# Altium PCB Stlink-v4-dongle.PcbDoc
Units mm, origin at the board's own origin, x right, y up, seen from the top; angles counter-clockwise.
Board outline 30.99 x 14.48 mm, 2 copper layers (Top Layer, Bottom Layer); 32 components, 27 nets, 126 pads, 31 vias.
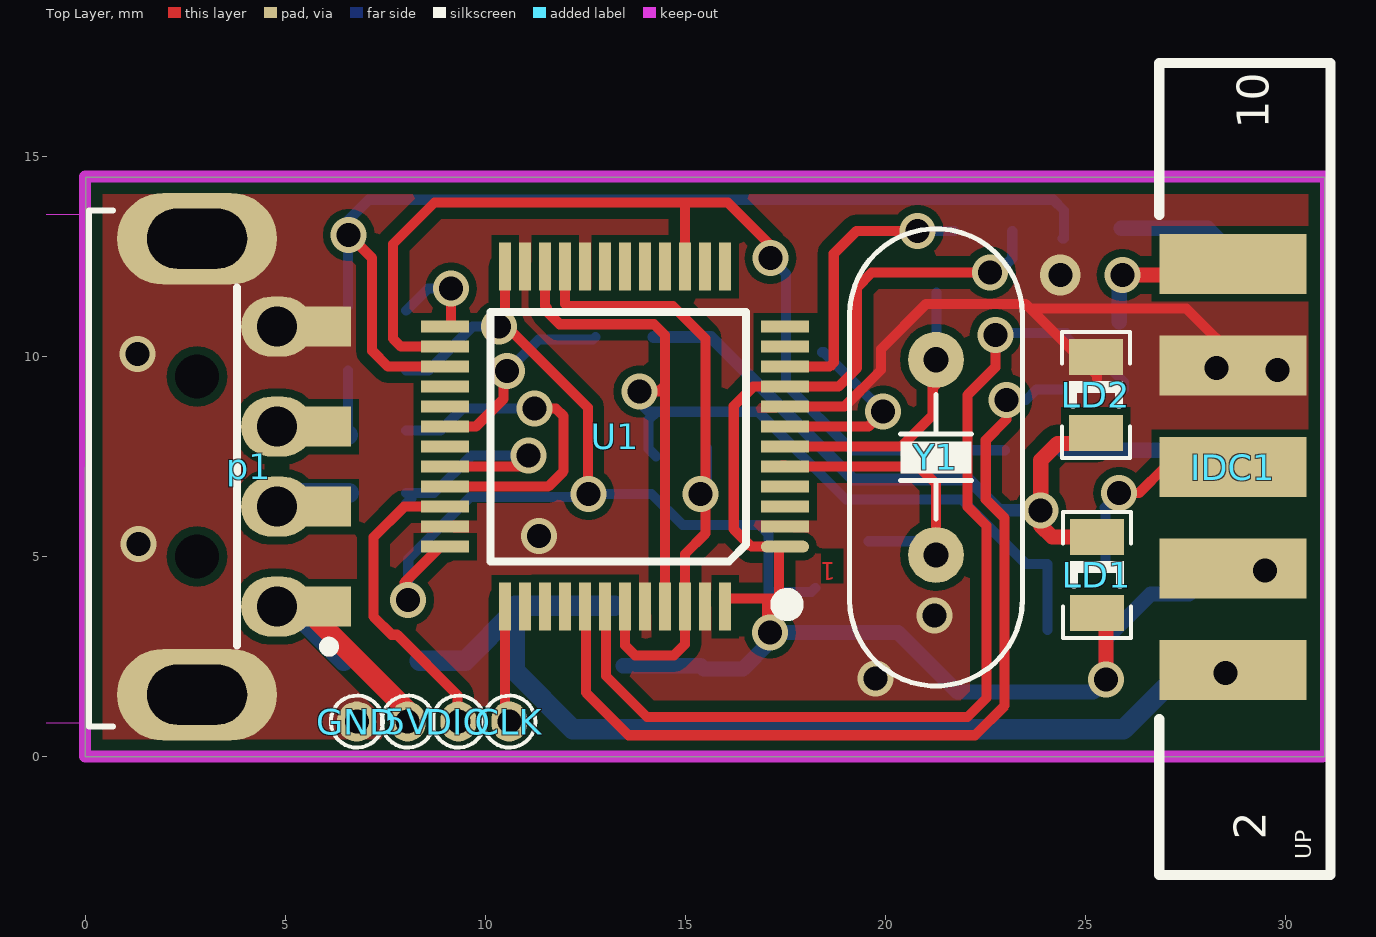
[diagram p0: Top Layer view]
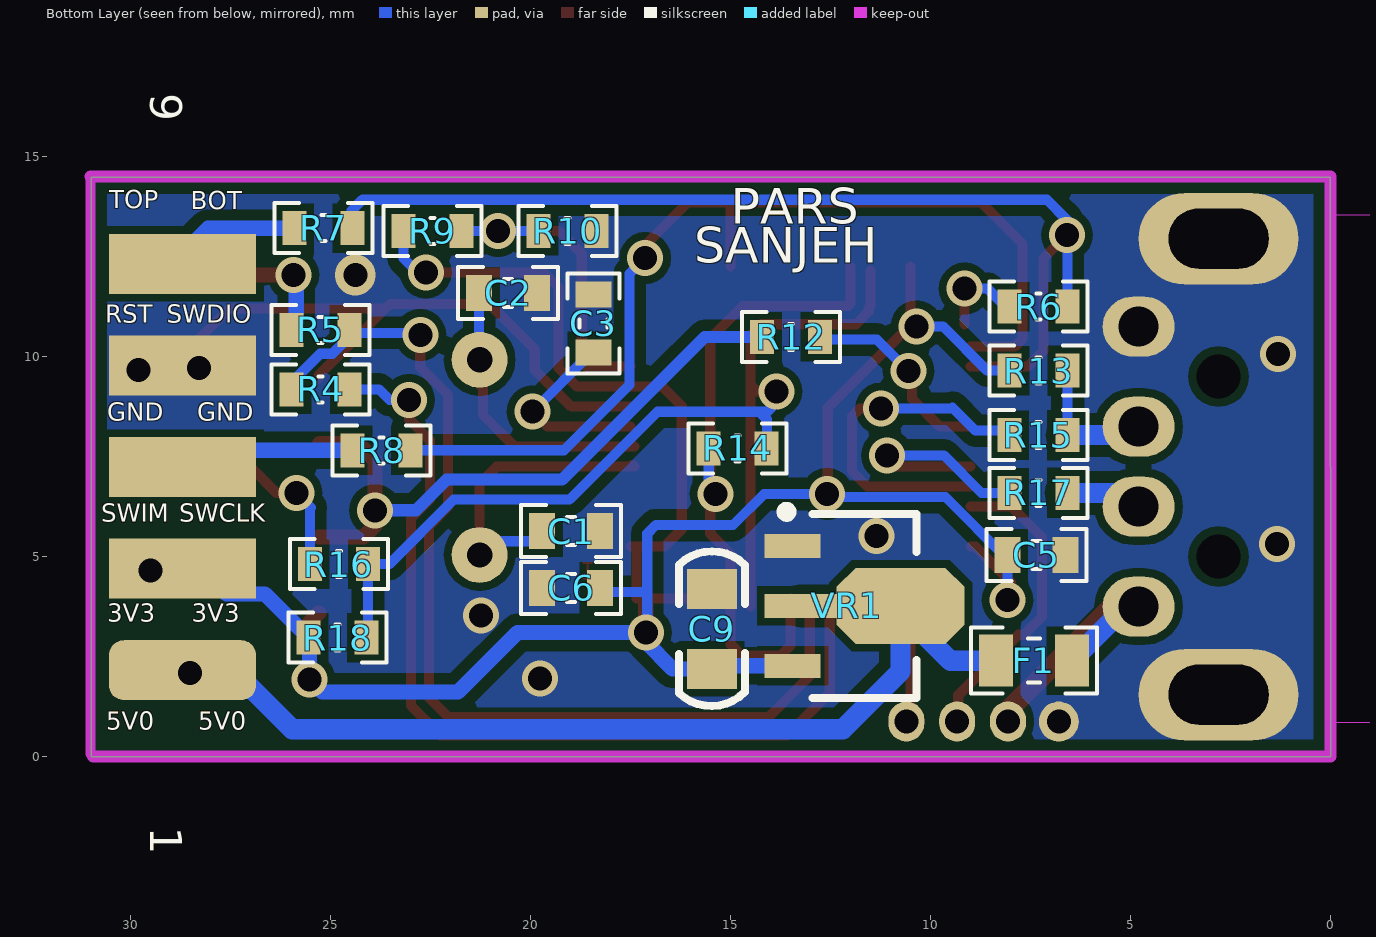
[diagram p1: Bottom Layer view, seen from below]
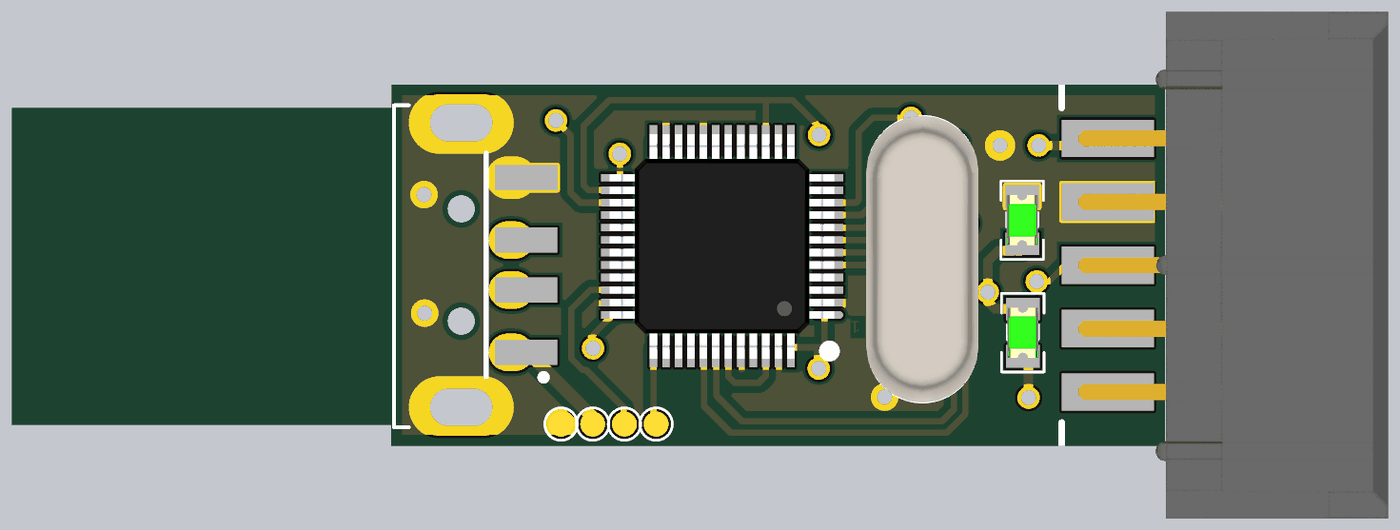
[diagram p2: 3D render of the assembled board from above, using the file's embedded part models]
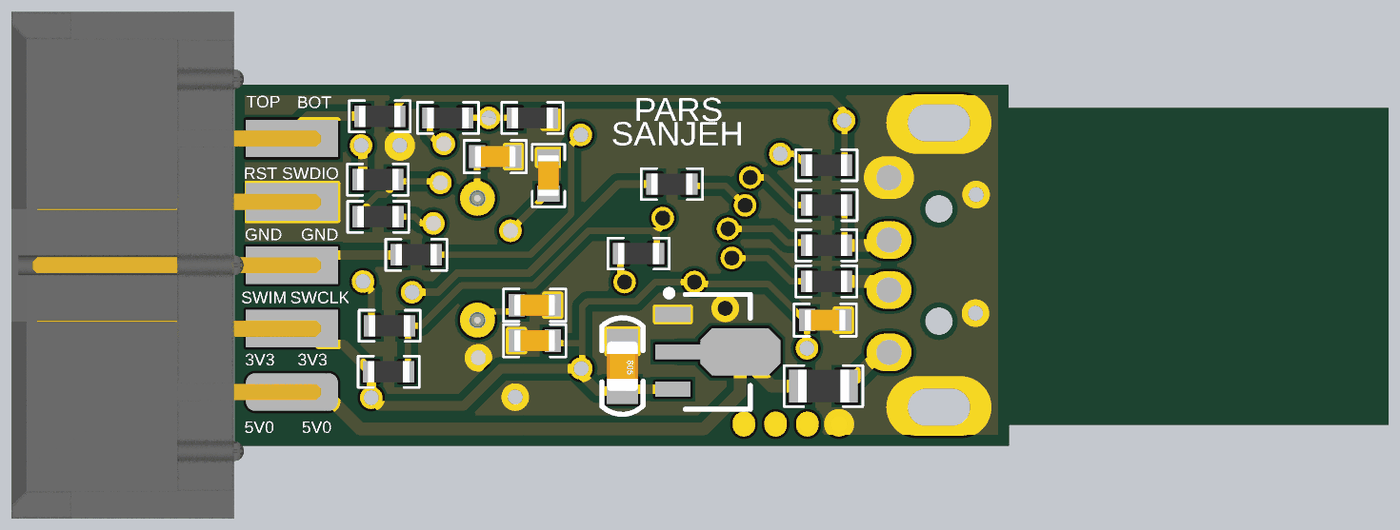
[diagram p3: 3D render of the assembled board from below, using the file's embedded part models]

## Layer stack, top to bottom
Top Solder: solder mask 0.0102, Solder Resist, Dk 3.5
Top Layer: signal copper 0.0356
Dielectric 1: dielectric 0.32, FR-4, Dk 4.8
Bottom Layer: signal copper 0.0356
Bottom Solder: solder mask 0.0102, Solder Resist, Dk 3.5

## Board outline
0.015,14.478 30.988,14.478 30.988,0 0,0

## Design rules (kind name [scope] priority, off if disabled: settings)
Clearance [All] p1: gap=0.2 ignorepadtopadclearanceinfootprint=FALSE except(0: Arc-Hole Track-Hole SMDPad-Hole THPad-Hole Via-Hole Fill-Hole Poly-Hole Region-Hole Text-Hole; 0.279: Arc-Fill Arc-Poly Arc-Region Track-Fill Track-Poly Track-Region)
DiffPairsRouting [All] p1: maxlimit=0.254 minlimit=0.178 mostfreqgap=0.254 toplayer_minwidth=0.254 toplayer_maxwidth=0.381 toplayer_prefwidth=0.254 bottomlayer_minwidth=0.254 bottomlayer_maxwidth=0.381 bottomlayer_prefwidth=0.254 maxuncoupledlength=12.7
PlaneConnect [All] p1: planeconnectstyle=Direct reliefexpansion=0.508 reliefentries=4 reliefconductorwidth=0.254 reliefairgap=0.254
PolygonConnect [All] p1: connectstyle=Direct reliefconductorwidth=0.254 reliefentries=4 polygonreliefangle="90 Angle" airgapwidth=0.254
RoutingVias [All] p1: holewidth=0.508 width=0.9 viastyle="Through Hole" minholewidth=0.508 minwidth=0.9 maxholewidth=0.508 maxwidth=0.9
SolderMaskExpansion [All] p1: expansion=0.102
Width [All] p1: maxlimit=5 minlimit=0.254 preferedwidth=0.254 minimp=50.000000 maximp=50.000000 favimp=50.000000
28 further rules are at their usual default settings.

## Classes and differential pairs
differential pair USBD: +USBD_P -USBD_N

## Components (designator, comment, footprint, x,y, rotation, side; value= is the part's Value field where it differs from the comment)
5V "Test Point" "TEST POINT SMALL"#1 8.067,0.875 r180 top
C1 "Capacitor SMD" CAP0603 18.985,5.639 r0 bottom value=22pF
C2 "Capacitor SMD" CAP0603 20.563,11.593 r0 bottom value=22pF
C3 "Capacitor SMD" CAP0603 18.43,10.831 r270 bottom value=0.1uF
C5 "Capacitor SMD" CAP0603 7.355,5.04 r0 bottom value=0.1uF
C6 "Capacitor SMD" CAP0603 18.985,4.216 r180 bottom value=0.1uF
C9 "Capacitor SMD" "0805 Capacitor" 15.469,3.191 r0 bottom value=10uF
CLK "Test Point" "TEST POINT SMALL"#1 10.607,0.875 r180 top
DIO "Test Point" "TEST POINT SMALL"#1 9.337,0.875 r180 top
F1 "100mA" RES0805 7.421,2.399 r0 bottom
GND "Test Point" "TEST POINT SMALL"#2 6.797,0.875 r180 top
IDC1 "CONNECTOR_IDC_5X2" "IDC2.54-10PIN - CROSS" 28.956,7.239 r90 top
LD1 "Grn" LED_0805 25.298,4.562 r90 top
LD2 "Red" LED_0805 25.273,9.068 r90 top
p1 "USB Connector" "USB A TYPE Right Angle" 0.1,7.248 r180 top
R4 "Resistor SMD" RES0603 25.249,9.18 r180 bottom value=220R
R5 "Resistor SMD" RES0603 25.259,10.668 r0 bottom value=100R
R6 "Resistor SMD" RES0603 7.3,11.248 r180 bottom value=100R
R7 "Resistor SMD" RES0603 25.183,13.208 r0 bottom value=100R
R8 "Resistor SMD" RES0603 23.724,7.656 r0 bottom value=100R
R9 "Resistor SMD" RES0603 22.455,13.143 r180 bottom
R10 "Resistor SMD" RES0603 19.076,13.143 r0 bottom
R12 "Resistor SMD" RES0603 13.487,10.49 r180 bottom value=1.8K
R13 "Resistor SMD" RES0603 7.3,9.648 r0 bottom value=1K5
R14 "Resistor SMD" RES0603 14.823,7.707 r0 bottom value=220R
R15 "Resistor SMD" RES0603 7.305,8.037 r0 bottom value=22R
R16 "Resistor SMD" RES0603 24.791,4.812 r0 bottom value=100R
R17 "Resistor SMD" RES0603 7.305,6.59 r0 bottom value=22R
R18 "Resistor SMD" RES0603 24.827,2.972 r0 bottom value=680R
U1 "STM32F103C8T6" LQFP48 13.25,7.998 r180 top
VR1 "HT7533-3" SOT89N 11.651,3.769 r180 bottom
Y1 "8MHz" "CRYSTAL Small" 21.275,7.48 r90 top

## Footprints (in the part's own frame and the unit in brackets; to place one, negate y for a bottom-side part, rotate by r counter-clockwise, add the part's x,y. Pads: shape width x height; smd on the part's side, far side on the other; paste and mask are expansions set on the pad)
"0805 Capacitor" [mm]
  rect 1.25x1 smd: 1(0,-1) 2(0,1)
  silkscreen extent -0.82,-1.94 0.83,1.93, body extent -0.62,-1 0.63,1, height 0.78
CAP0603 [mm] "Chip Capacitor, 2-Leads, Body 1/60x0/80mm, IPC Medium Density DESIGNER:ABBAS BASEREH"
  rect 0.65x0.9 smd: 1(-0.725,0) 2(0.725,0)
  silkscreen extent -1.25,-0.65 1.25,0.65, body extent -0.82,-0.43 0.83,0.43, height 0.4
"CRYSTAL Small" [mil] "DESIGNER ABBAS BASEREH"
  round 55 hole 25: 1(-96.06,0) 2(96.06,0)
  silkscreen extent -225,-85 225,85, body extent -226,-89 226,89, height 142
"IDC2.54-10PIN - CROSS" [mil] "Connector; IDC, Low Profile Male Header, Thru-Hole; 10 Position; Vertical; Pitch 2.54 mm; 20.32 x 9.2 x 9.45 mm (LxWxH) DESIGNER : ABBAS BASEREH"
  rrect50% 59.06x145 smd far side: 1(-200,10)
  rect 59.06x145 smd: 2(-200,10) 4(-100,10) 6(0,10) 8(100,10) 10(200,10)
  rect 59.06x145 smd far side: 3(-100,10) 5(0,10) 7(100,10) 9(200,10)
  silkscreen extent -402,-86 398,83, body extent -400,-432 400,56, height 168
LED_0805 [mm]
  rect 0.9x1.35 smd: 1(-0.975,0) 2(0.925,0)
  silkscreen extent -1.6,-0.85 1.55,0.85, body extent -1.04,-0.62 0.98,0.63, height 1.1
LQFP48 [mm]
  oval 1.2x0.3 smd: 1(-4.25,2.75)
  rect 1.2x0.3 smd: 2(-4.25,2.25) 3(-4.25,1.75) 4(-4.25,1.25) 5(-4.25,0.75) 6(-4.25,0.25) 7(-4.25,-0.25) 8(-4.25,-0.75) 9(-4.25,-1.25) 10(-4.25,-1.75) 11(-4.25,-2.25) 12(-4.25,-2.75) 25(4.25,-2.75) 26(4.25,-2.25) 27(4.25,-1.75) 28(4.25,-1.25) 29(4.25,-0.75) 30(4.25,-0.25) 31(4.25,0.25) 32(4.25,0.75) 33(4.25,1.25) 34(4.25,1.75) 35(4.25,2.25) 36(4.25,2.75)
  rect 0.3x1.2 smd: 13(-2.75,-4.25) 14(-2.25,-4.25) 15(-1.75,-4.25) 16(-1.25,-4.25) 17(-0.75,-4.25) 18(-0.25,-4.25) 19(0.25,-4.25) 20(0.75,-4.25) 21(1.25,-4.25) 22(1.75,-4.25) 23(2.25,-4.25) 24(2.75,-4.25) 37(2.75,4.25) 38(2.25,4.25) 39(1.75,4.25) 40(1.25,4.25) 41(0.75,4.25) 42(0.25,4.25) 43(-0.25,4.25) 44(-0.75,4.25) 45(-1.25,4.25) 46(-1.75,4.25) 47(-2.25,4.25) 48(-2.75,4.25)
  silkscreen extent -4.59,-3.11 3.11,4.49, body extent -4.5,-4.5 4.5,4.5, height 1.61
RES0603 [mm] "Chip Resistor, 2-Leads, Body 1/60x0/80mm, IPC Medium Density DESIGNER:ABBAS BASEREH"
  rect 0.6x0.85 smd: 1(-0.725,0) 2(0.725,0)
  silkscreen extent -1.22,-0.63 1.22,0.63, body extent -0.82,-0.43 0.83,0.43, height 0.4
RES0805 [mm] "Chip Resistor, 2-Leads, Body 2/00x1/25mm, IPC Medium Density DESIGNER:ABBAS BASEREH"
  rect 0.85x1.3 smd: 1(-0.95,0) 2(0.95,0)
  silkscreen extent -1.58,-0.82 1.58,0.82, body extent -1.02,-0.65 1.02,0.65, height 0.5
SOT89N [mm] "SOT89, 3-Leads, Body 4.5x2.4 mm, Pitch 1.5mm, Lead Span 4.1mm, IPC Medium Density"
  rect 1.4x0.6 smd: 1(-1.8,1.5) 3(-1.8,-1.5)
  rect 1.8x0.6 smd: 2(-1.6,0)
  oct 3.2x1.9 smd: 2(0.9,0)
  silkscreen extent -2.07,-2.3 1.3,2.47, body extent -1.3,-2.3 1.3,2.3, height 1.6
"TEST POINT SMALL"#1 [mm]
  oval 0.9x1 hole 0.6: 1(0,0)
  silkscreen extent -0.65,-0.65 0.65,0.65, body extent -0.5,-0.5 0.5,0.5, height 6.5
"TEST POINT SMALL"#2 [mm]
  round 1 hole 0.6: 1(0,0)
  silkscreen extent -0.65,-0.65 0.65,0.65, body extent -0.5,-0.5 0.5,0.5, height 6.5
"USB A TYPE Right Angle" [mm] "Connector; USB1.1, Type A, SM; 4 Position; Right Angle DESIGNER ABBAS BASEREH"
  rect 2.5x1 smd: 1(-5.3,3.5) 2(-5.3,1) 3(-5.3,-1) 4(-5.3,-3.5)
  oval 1.8x1.5 hole 1: 1(-4.7,3.5) 2(-4.7,1) 3(-4.7,-1) 4(-4.7,-3.5)
  oval 4x2.286 hole 1.5 slot 2.5 at 0 deg: 5(-2.7,-5.7) 6(-2.7,5.7)
  round 0.8 hole 1.1 unplated: MH1(-2.7,-2.25) MH2(-2.7,2.25)
  Keep-Out Layer board cut-out: 0,6.4 0,-6.3 15.3,-6.3 15.3,6.4
  silkscreen extent -6.13,-6.4 0,6.5, body extent -4.9,-6.3 15.1,6.3, height 3.45

## Part data
F1: library part "Fuse 1", "100mA resetable fuse", LatestRevisionDate=17-Jul-2002, LatestRevisionNote="Re-released for DXP Platform.", PackageDescription="Thru-Hole; 2 Leads", PackageReference=PIN-W2/E2.8, Published=8-Jun-2000, Publisher="Altium Limited"
IDC1: library part "IDC_5X2 HEADER", "Header, 5-Pin, Dual row", Manufacturer=CHINA, Max Current=mA, Category=Connector, ComponentLink1Description=Datasheet, ComponentLink2Description=Reference, Connector Type="IDC5X2  PROGPIN", designer="ABBAS BASEREH", LatestRevisionDate=1395-11-17, Mounting Technology=Through-Hole, Pin Count=10, Publisher="ABBAS BASEREH", Status=Unreleased, Update=2017-2-4
LD1 LD2: library part "LED SMD"
p1: library part "USB A CONNECTOR", "USB Connector-A Type", Max Current=600mA, Category=Connector, ComponentLink1Description=Datasheet, ComponentLink2Description=Reference, designer="ABBAS BASEREH", Mounting Technology="Surface Mount\Through-Hole", Pin Count=4-6, Publisher="ABBAS BASEREH", Status=Unreleased, Update=1395-11-17
U1: "STM32 ARM-based 32-bit MCU with 64 Kbytes Flash, 48-pin LQFP, Industrial Temperature", ComponentLink1Description="Manufacturer Link", ComponentLink1URL=www.st.com/stm32, ComponentLink2Description=Datasheet, ComponentLink2URL=http://www.st.com/stonline/products/literature/ds/13587.pdf, DatasheetVersion="rev6, Mar-2008", PackageDescription="48-Pin Low-Profile Quad Flat Pack, 7 x 7 mm Body, 0.5 mm Pitch (LQFP48)", PackageReference=LQFP48, PackageVersion=Mar-2008, Published=30-May-2008, Publisher="Altium Limited"
VR1: library part HT7530-1, "3.0V 100mA Low Power,  Low Dropout Voltage (LDO) Regulator", Code_IPC=SOT89, ComponentLink1Description="Manufacturer Link", ComponentLink1URL=http://www.holtek.com/, ComponentLink2Description=Datasheet, ComponentLink2URL=http://www.holtek.com/pdf/consumer/75xx_1v150.pdf, DatasheetVersion="rev1.50, Jan-2006", PackageDescription="3-Pin SOT-89 Package 1.5 mm Pitch, 4.1 mm Lead Span", PackageReference=SOT-89, PackageVersion=Jan-2006, Published=30-Mar-2007, Publisher="Altium Limited"
Y1: library part XTAL, "XTAL Crystal", Company=E.P.I.L, Design Date=11/04/2011
R9 R10: =10K

## Via types
v1: diameter 0.9, hole 0.6, Top Layer to Bottom Layer, 27 vias
v2: diameter 1.016, hole 0.6, Top Layer to Bottom Layer, 4 vias

## Nets (pads, with @x,y where several pads share a name; then routed paths per layer and width w, separated by ;. In a path a pad name is that pad's centre, name@x,y a point inside that pad or via, vN(x,y) a via of type N, cw(c..) or ccw(c..) an arc to the next point about the centre after c; other vN are vias at no path point)
3V3: C5.2 C6.2 C9.2 IDC1.3 IDC1.4 LD1.1 R9.1 R13.2 R18.2 U1.1 U1.9 U1.24 U1.36 U1.48 VR1.3 | length 64.9
  Top Layer w0.254: v1(8.08,3.911) 8.08,4.264 7.99,4.354 8.884,5.248 U1.36 ; v1(10.353,10.755) 10.5,10.903 U1.24 ; v1@10.5,10.792 12.573,8.719 12.573,6.579 v1(12.588,6.564) ; U1.48@16,3.948 17.35,3.948 U1.1@17.35,5.098 ; U1.1 16.658,5.248 16.22,5.686 16.22,8.765 16.703,9.248 U1.9 18.839,9.248 19.304,9.713 19.304,11.735 19.671,12.101 v1(22.621,12.101)
  Top Layer w0.381: v1(17.12,3.099) 17.12,3.81 ; LD1.1 25.527,3.358 v1(25.527,1.93)
  Bottom Layer w0.254: R13.2 8.585,9.648 9.692,10.755 v1(10.353,10.755) ; v1(8.08,3.911) 8.08,4.939 9.63,6.488 12.639,6.488 12.588,6.539 v1(12.588,6.564) 14.163,6.564 14.94,5.787 16.87,5.787 17.084,5.573 17.084,4.115 ; v1@17.084,3.421 17.084,4.115 ; C6.2 18.159,4.115 17.084,4.115 ; v1@22.672,12.152 v1(22.621,12.101) 22.824,12.101 23.18,12.457 R9.1
  Bottom Layer w0.381: VR1.3 15.391,2.269 C9.2 16.452,2.191 17.12,2.859 v1(17.12,3.099) 20.325,3.099 21.813,1.611 25.208,1.611 v1(25.527,1.93) 25.527,2.946 R18.2 26.645,4.064 27.6,4.064 28.194,4.658 v1(29.5,4.658)
5V: 5V.1 F1.1 p1.1 | length 6
  Top Layer w0.508: p1.1@5.4,3.748 5.473,3.748 5V.1@8.069,1.151
  Bottom Layer w0.508: p1.1@4.8,3.748 5.122,3.748 F1.1
5VF: F1.2 IDC1.1 IDC1.2 VR1.2 | length 26.4
  Bottom Layer w0.457: IDC1.1@27.438,2.159 IDC1.1@28.956,2.159
  Bottom Layer w0.508: F1.2 9.503,2.399 VR1.2@10.748,3.643 ; VR1.2@13.251,3.769 10.751,3.769 10.751,2.127 12.192,0.686 25.964,0.686 IDC1.1@27.438,2.159
  other v2: 28.514,2.094
GND: C1.1 C2.1 C3.1 C5.1 C6.1 C9.1 GND.1 IDC1.7 IDC1.8 LD2.2 p1.4 p1.5 p1.6 R10.1 U1.2 U1.8 U1.20 U1.23 U1.35 U1.44 U1.47 VR1.1 | length 15.9
  Top Layer w0.254: U1.8 18.981,8.748 19.898,9.665 19.898,10.184 21.032,11.318 23.512,11.318 23.628,11.202 ; 25.3,9.448 25.3,9.53 23.628,11.202 ; IDC1.8@28.956,9.779 27.533,11.202 23.628,11.202
  other v1: 19.761,1.956 21.234,3.531 1.336,5.32 11.354,5.512 1.31,10.069
  other v2: 29.809,9.663 28.285,9.714 24.384,12.04
LED_STLINK: R12.2 U1.30 | length 5
  Top Layer w0.254: U1.30 9.768,8.248 10.465,8.944 10.465,9.546 v1(10.556,9.638)
  Bottom Layer w0.254: v1(10.556,9.638) 11.343,10.425 12.697,10.425 R12.2
NetLD1_2: LD1.2 LD2.1 R12.1 | length 16.2
  Top Layer w0.381: LD2.1@25.273,7.828 24.313,7.828 23.891,7.406 v1(23.891,6.158) 23.891,5.776 24.181,5.486 LD1.2
  Bottom Layer w0.305: R12.1 15.646,10.49 19.214,6.923 22.102,6.923 22.867,6.158 v1(23.891,6.158)
Netp1_2: p1.2 R17.1 | length 1.9
  Bottom Layer w0.5: p1.2@4.8,6.248 5.142,6.59 R17.1@6.605,6.59
Netp1_3: p1.3 R13.1 R15.1 | length 3.4
  Bottom Layer w0.254: R15.1@6.575,8.148 R13.1
  Bottom Layer w0.5: p1.3@4.8,8.248 5.01,8.037 R15.1
OSC_IN: C1.2 U1.5 Y1.1 | length 8
  Top Layer w0.254: U1.5@17.4,7.248 17.423,7.271 U1.5@17.5,7.271 ; U1.5 20.845,7.248 21.275,6.818 Y1.1@21.275,5.233 ; Y1.1 Y1.1@21.275,5.233 ; Y1.1@21.5,5.008 Y1.1@21.275,5.233
  Bottom Layer w0.254: C1.2@19.583,5.385 20.93,5.385 Y1.1
OSC_OUT: C2.2 U1.6 Y1.2 | length 7.4
  Top Layer w0.254: U1.6@17.4,7.752 17.588,7.752 U1.6@17.592,7.748 ; U1.6 U1.6@17.592,7.748 ; Y1.2@21.5,9.888 21.5,9.532 21.192,9.224 21.192,8.54 20.4,7.748 U1.6@17.592,7.748
  Bottom Layer w0.254: Y1.2 21.288,9.934 C2.2
PA0: R9.2 R10.2 U1.10 | length 8.2
  Top Layer w0.254: U1.10 18.616,9.748 18.72,9.851 18.72,12.573 19.29,13.143 v1(20.817,13.143)
  Bottom Layer w0.254: R10.2 v1(20.817,13.143) R9.2
RESET: C3.2 U1.7 | length 4.7
  Top Layer w0.254: U1.7 19.58,8.248 v1(19.954,8.622)
  Bottom Layer w0.254: C3.2 18.469,10.106 v1(19.954,8.622)
STM8_RST: IDC1.10 R5.2 | length 4.9
  Top Layer w0.381: v1(25.933,12.04) 27.566,12.04 27.804,12.278 IDC1.10@29.5,12.278
  Bottom Layer w0.381: R5.2@25.857,10.871 25.857,11.063 25.857,11.963 v1(25.933,12.04)
STM8_SWIM: IDC1.6 R16.2 | length 5.8
  Top Layer w0.254: v1(25.855,6.586) 26.348,6.586 27,7.239 IDC1.6@28.956,7.239
  Top Layer w0.381: IDC1.6@28.956,7.198 IDC1.6@29.5,7.198
  Bottom Layer w0.254: R16.2 25.516,6.201 25.493,6.225 v1(25.855,6.586)
STM_SWCLK: CLK.1 U1.37 | length 3.4
  Top Layer w0.254: CLK.1@10.5,0.857 U1.37 U1.37@10.5,3.948 ; CLK.1@10.525,1.035 CLK.1@10.713,0.848
STM_SWDIO: DIO.1 U1.34 | length 7.9
  Top Layer w0.254: U1.34 7.979,6.248 7.213,5.482 7.213,3.499 7.669,3.044 7.802,3.044 9.311,1.535 DIO.1@9.311,0.697 ; DIO.1@9.443,0.848 DIO.1@9.443,0.875
SWIM: R14.1 R16.1 R18.1 U1.22 U1.45 | length 26.8
  Top Layer w0.254: U1.22@11.5,12.148 11.5,11.263 11.546,11.217 11.546,11.13 11.867,10.809 14.225,10.809 14.5,10.534 14.5,9.231 ; v1(13.858,9.13) 14.348,9.13 14.475,9.257 14.5,9.231 ; U1.45 14.5,9.231
  Bottom Layer w0.254: v1(13.858,9.13) 13.858,8.85 14.086,8.622 14.29,8.622 ; R14.1@14.276,7.504 14.086,7.693 14.086,8.418 14.29,8.622 ; R18.1@24.066,3.161 R16.1 23.535,4.812 21.92,6.427 19.024,6.427 16.829,8.622 14.29,8.622
SWIM_IN: R14.2 U1.21 U1.43 U1.46 | length 16.8
  Top Layer w0.254: U1.21 12,11.318 12.055,11.263 14.696,11.263 15.509,10.45 15.509,5.574 15,5.065 U1.46 15,2.804 14.721,2.526 13.754,2.526 13.5,2.78 U1.43@13.5,3.948
  Bottom Layer w0.254: v1(15.382,6.564) 15.548,6.73 R14.2
SWIM_RST: R4.1 R5.1 U1.42 | length 25.4
  Top Layer w0.254: U1.42 13.023,3.725 13.023,2.014 14.049,0.987 22.062,0.987 22.537,1.462 22.537,5.769 22.065,6.241 22.065,9.042 22.758,9.735 v1(22.758,10.541)
  Bottom Layer w0.254: v1(22.758,10.541) 22.809,10.592 R5.1@24.487,10.592 ; R5.1@24.534,10.592 R5.1@24.487,10.592 ; R4.1 25.974,9.358 25.262,10.069 24.958,10.069 24.487,10.54 R5.1@24.487,10.592
SWIM_RST_IN: R4.2 U1.41 | length 23.2
  Top Layer w0.254: U1.41@12.5,3.948 U1.41 12.523,3.725 12.523,1.599 13.589,0.533 22.25,0.533 22.991,1.274 22.991,5.958 22.519,6.43 22.519,7.91 23.038,8.429 v1(23.038,8.915)
  Bottom Layer w0.254: v1(23.038,8.915) 23.524,8.915 23.789,9.18 R4.2
T_JTCK: R8.1 U1.15 U1.26 | length 25.5
  Top Layer w0.254: U1.26 7.9,10.248 7.7,10.448 7.7,12.814 8.737,13.851 15.011,13.851 ; U1.15 15,13.839 15.011,13.851 ; v1(17.134,12.461) 17.134,12.787 16.071,13.851 15.011,13.851
  Bottom Layer w0.254: v1(17.134,12.461) 17.526,12.07 17.526,9.297 19.166,7.656 R8.1
T_JTMS: R6.2 R7.1 U1.27 | length 26.2
  Top Layer w0.254: v1(6.593,13.041) 7.178,12.457 7.178,10.146 7.576,9.748 U1.27
  Bottom Layer w0.254: R6.2 6.575,13.023 v1(6.593,13.041) 6.593,13.422 7.091,13.92 24.206,13.92 24.475,13.651 24.475,12.948 R7.1@24.442,12.948
T_SWDIO_IN: R6.1 U1.25 | length 2.3
  Top Layer w0.254: U1.25@9.15,10.798 v1(9.15,11.698)
  Bottom Layer w0.254: R6.1@8.025,11.148 8.575,11.698 v1(9.15,11.698)
TCK(SWCLK): IDC1.5 R8.2 | length 4.7
  Bottom Layer w0.381: R8.2 28.539,7.656 IDC1.5@28.956,7.239
TMS(SWDIO): IDC1.9 R7.2 | length 4
  Bottom Layer w0.381: R7.2 28.067,13.208 IDC1.9@28.956,12.319 ; IDC1.9@28.956,12.278 IDC1.9@29.5,12.278
USBD_N: R17.2 U1.32 | length 6
  Top Layer w0.254: U1.32 11.087,7.248 11.089,7.25 v1(11.089,7.529)
  Bottom Layer w0.254: R17.2@8.025,6.319 R17.2@8.162,6.457 ; R17.2 8.727,6.59 9.667,7.529 v1(11.089,7.529)
USBD_P: R15.2 U1.33 | length 8.8
  Top Layer w0.254: U1.33 11.577,6.748 11.966,7.136 11.966,8.507 11.775,8.698 v1(11.242,8.698)
  Bottom Layer w0.254: R15.2@8.025,8.148 8.879,8.148 9.455,8.723 9.48,8.698 v1(11.242,8.698)
pads on no net: p1.MH1 p1.MH2 U1.3 U1.4 U1.11 U1.12 U1.13 U1.14 U1.16 U1.17 U1.18 U1.19 U1.28 U1.29 U1.31 U1.38 U1.39 U1.40

## Polygon pours and split planes (outlines as drawn)
GND on Bottom Layer "Bottom Layer-GND" (solid, remove dead copper, pour order 2): 31.7,-0.252 0,-0.252 0,14.648 31.6,14.648
GND on Top Layer "Top Layer-GND" (solid, remove dead copper, pour order 4): 31.7,-0.252 0,-0.252 0,14.548 31.5,14.548 31.6,14.648

## Keep-outs
Keep-Out Layer:
  lines w0.254: 31,0.063 31,14.5
  lines w0.3: 30.937,0 0,0 0,14.5 31,14.5

## Other copper
Top Layer:
  text "1" at 18.771,5.004 h0.76 r180

## Silkscreen, mask and mechanical layers (free items; w line width, h text height)
Bottom Overlay:
  text "TOP" at 30.531,13.564 h0.76
  text "BOT" at 28.499,13.538 h0.76
  text "PARS" at 15.001,13.016 h1.52
  text "SANJEH" at 15.915,12.051 h1.52
  text "SWDIO" at 29.098,10.693 h0.76
  text "RST" at 30.632,10.693 h0.76
  text "GND" at 28.336,8.241 h0.76
  text "GND" at 30.586,8.241 h0.76
  text "SWCLK" at 28.778,5.715 h0.76
  text "SWIM" at 30.734,5.715 h0.76
  text "3V3" at 28.473,3.226 h0.76
  text "3V3" at 30.582,3.226 h0.76
  text "5V0" at 28.31,0.519 h0.76
  text "5V0" at 30.607,0.519 h0.76

## Dimensions
0,-0.252 to 31.5,14.548 on Mechanical 2
0,14.5 to 0,0 on Mechanical 2

## Text inside footprints (layer, text, board x,y; h text height)
IDC1: Top Overlay "2" at 29.515,-2.083 h0.8 r90; Top Overlay "10" at 29.591,15.697 h0.8 r90; Top Overlay "UP" at 30.656,-2.561 h0.4 r90; Bottom Overlay "1" at 29.515,-1.753 h0.8 r90; Bottom Overlay "9" at 29.515,16.586 h0.8 r90
p1: Mechanical 1 "PCB Edge" at -0.373,12.42 h0.25 r270